# Altium PCB ORCILLOGRAPH.PcbDoc
Units mil, origin at the board's own origin, x right, y up, seen from the top; angles counter-clockwise.
Board outline 1970 x 1574.8 mil, 2 copper layers (Top Layer, Bottom Layer); 55 components, 42 nets, 174 pads, 20 vias.
Unrouted connection lines stored in the file: 1.
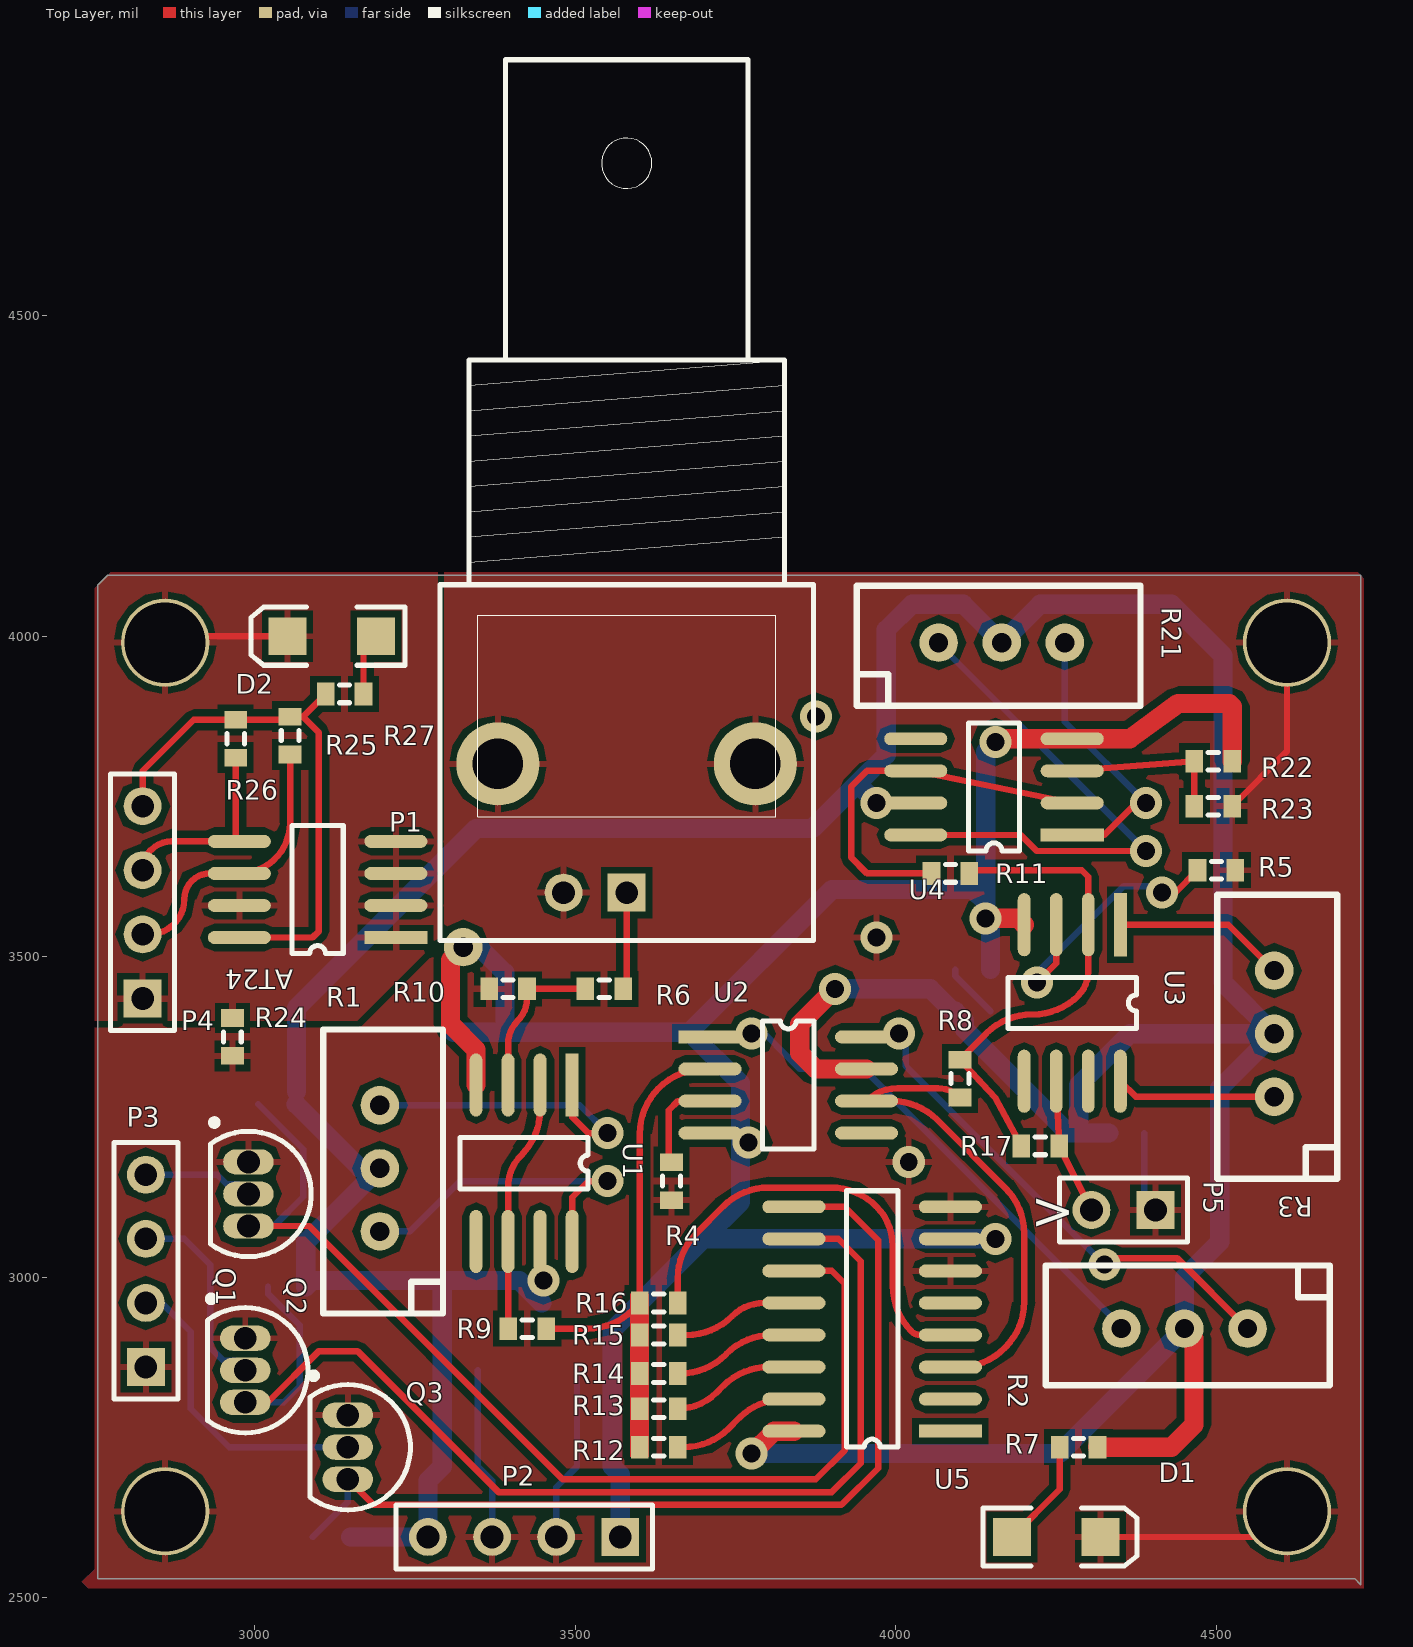
[diagram p0: Top Layer view]
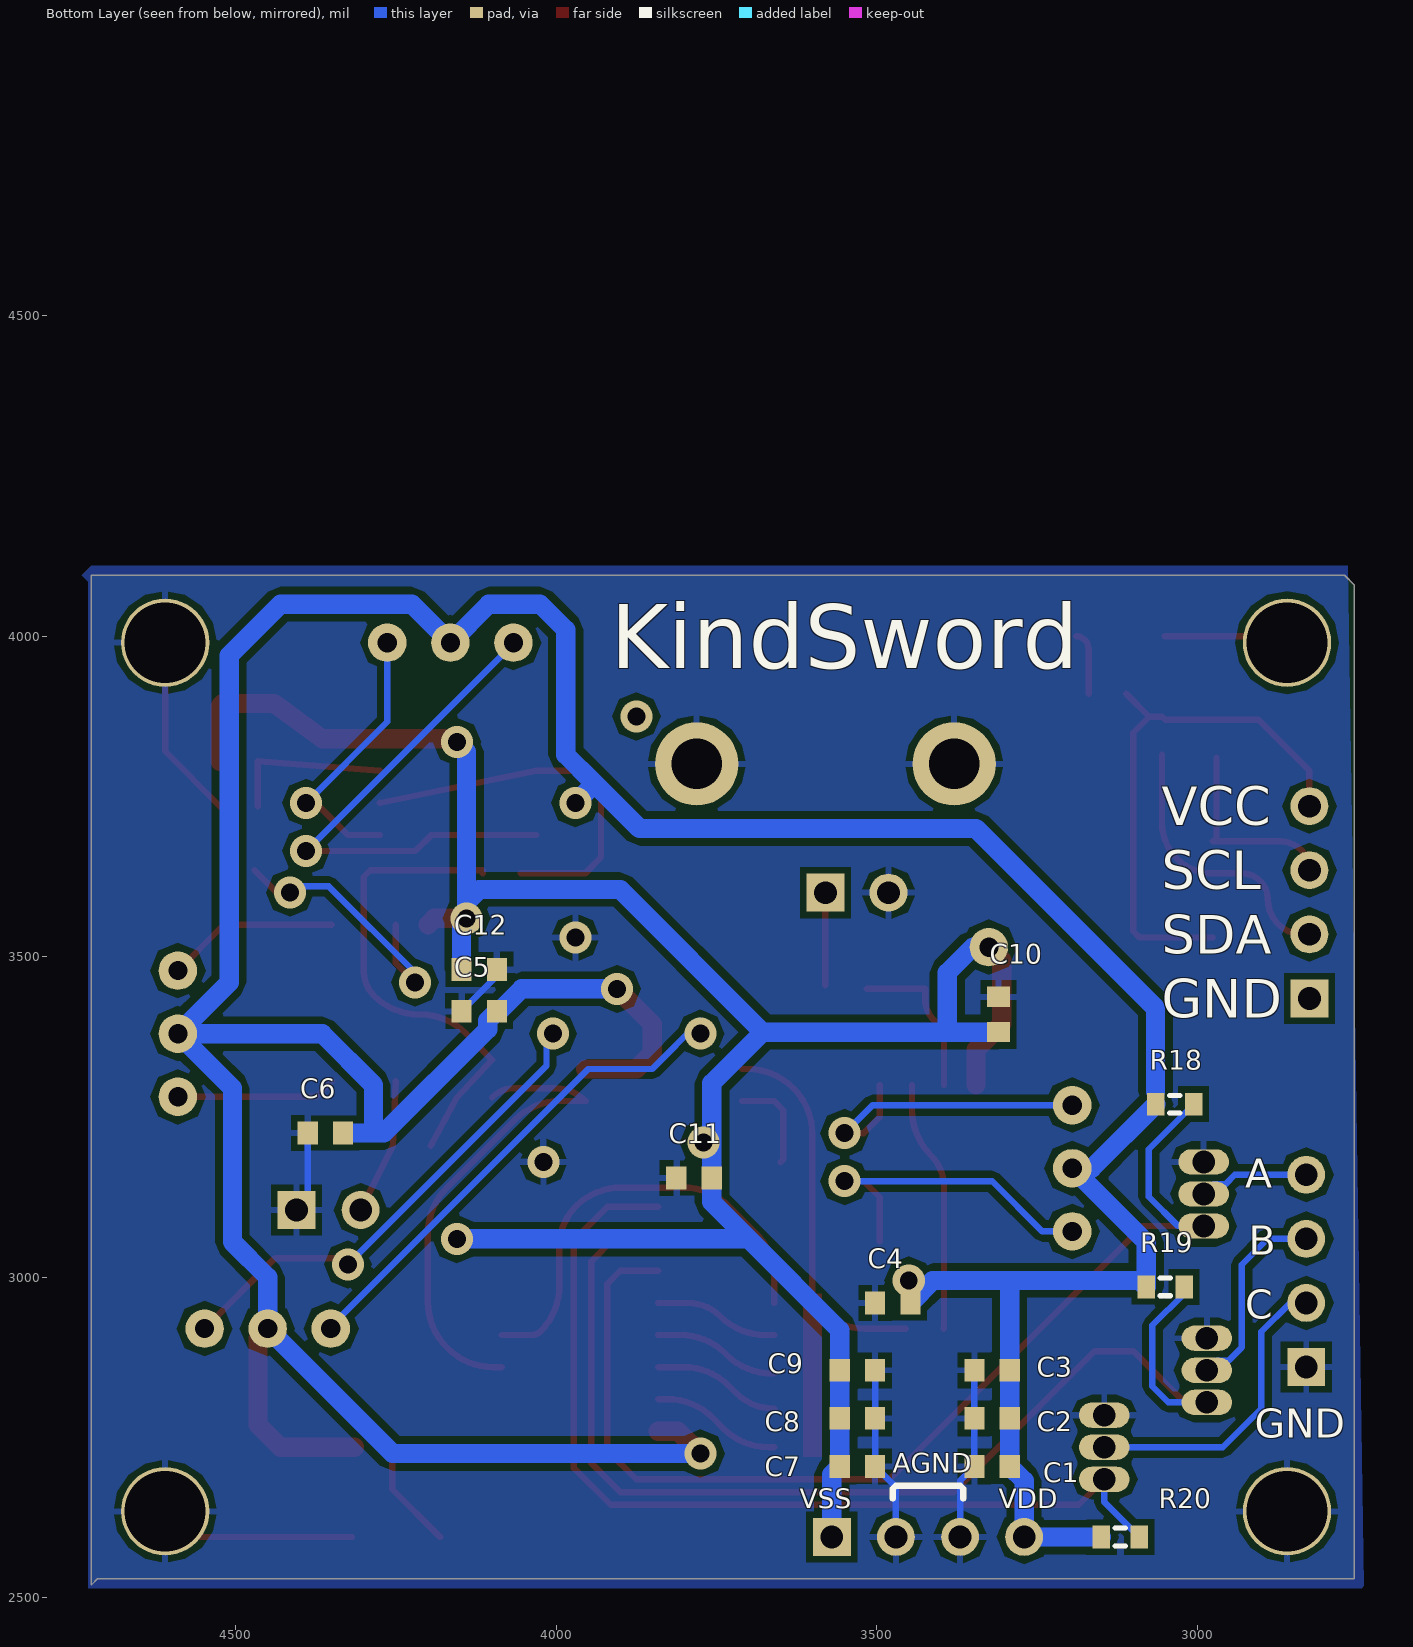
[diagram p1: Bottom Layer view, seen from below]

## Layer stack, top to bottom
Top Layer: signal copper 1.4
Dielectric: dielectric 12.6, FR-4, Dk 4.8
Bottom Layer: signal copper 1.4

## Board outline
2770,4095 2755,4080 2755,2530 4715.2,2530 4725,2520.2 4725,4095

## Design rules (kind name [scope] priority, off if disabled: settings)
Clearance [All] p1: gap=10
PolygonConnect [All] p1: connectstyle=Relief reliefconductorwidth=10 reliefentries=4 polygonreliefangle="90 Angle" airgapwidth=10
RoutingVias [All] p1: holewidth=28 width=50 viastyle="Through Hole" minholewidth=28 minwidth=50 maxholewidth=28 maxwidth=50
SolderMaskExpansion [All] p1: expansion=4
Width Width_VSS [InNet('VSS')] p1: maxlimit=50 minlimit=30 preferedwidth=40
Width Width_VDD [InNet('VDD')] p2: maxlimit=50 minlimit=30 preferedwidth=50
Width Width_ALL [All] p3: maxlimit=10 minlimit=10 preferedwidth=10
28 further rules are at their usual default settings.

## Components (designator, comment, footprint, x,y, rotation, side; value= is the part's Value field where it differs from the comment)
AT24 "AT24C32" AT24 3220,3530 r180 top (schematic designator AT1)
C1 "Cap Semi" 1608[0603] 3320,2705 r180 bottom
C2 "Cap Semi" 1608[0603] 3320,2780 r180 bottom
C3 "Cap Semi" 1608[0603] 3320,2855 r180 bottom
C4 "Cap Semi" 1608[0603] 3475,2960 r180 bottom
C5 "Cap Semi" 1608[0603] 4120,3415 r180 bottom
C6 "Cap Semi" 1608[0603] 4360,3225 r180 bottom
C7 "Cap Semi" 1608[0603] 3530,2705 r180 bottom
C8 "Cap Semi" 1608[0603] 3530,2780 r180 bottom
C9 "Cap Semi" 1608[0603] 3530,2855 r180 bottom
C10 "Cap Semi" 1608[0603] 3310,3410 r90 bottom
C11 "Cap Semi" 1608[0603] 3785,3155 r0 bottom
C12 "Cap Semi" 1608[0603] 4120,3480 r180 bottom
D1 "LED2" 3.2X1.6X1.1 4250,2595 r0 top
D2 "LED2" 3.2X1.6X1.1 3120,4000 r180 top
P1 "BNC" "BNC_RA CON" 3580,3600 r270 top
P2 "Header 4" HDR1X4 3570,2595 r180 top
P3 "Header 4" HDR1X4 2830,2860 r90 top
P4 "Header 4" HDR1X4 2825,3435 r90 top
P5 "Header 2" HDR1X2 4405,3105 r180 top
Q1 "2N3904" TO-92A 2990,3130 r180 top
Q2 "2N3904" TO-92A 2985,2855 r180 top
Q3 "2N3904" TO-92A 3145,2735 r180 top
R1 "可调电阻" 3296可调电阻 3195,3070 r90 top
R2 "可调电阻" 3296可调电阻 4550,2920 r180 top
R3 "可调电阻" 3296可调电阻 4590,3280 r90 top
R4 "Res3" J1-0603 3650,3150 r90 top
R5 "Res3" J1-0603 4500,3635 r180 top
R6 "Res3" J1-0603 3545,3450 r0 top
R7 "Res3" J1-0603 4285,2735 r0 top
R8 "Res3" J1-0603 4100,3310 r270 top
R9 "Res3" J1-0603 3425,2920 r180 top
R10 "Res3" J1-0603 3395,3450 r0 top
R11 "Res3" J1-0603 4085,3630 r180 top
R12 "Res3" J1-0603 3630,2735 r180 top
R13 "Res3" J1-0603 3630,2795 r180 top
R14 "Res3" J1-0603 3630,2850 r180 top
R15 "Res3" J1-0603 3630,2910 r180 top
R16 "Res3" J1-0603 3630,2960 r180 top
R17 "Res3" J1-0603 4225,3205 r180 top
R18 "Res3" J1-0603 3035,3270 r0 bottom
R19 "Res3" J1-0603 3050,2985 r0 bottom
R20 "Res3" J1-0603 3120,2595 r0 bottom
R21 "可调电阻" 3296可调电阻 4065,3990 r0 top
R22 "Res3" J1-0603 4495,3805 r180 top
R23 "Res3" J1-0603 4495,3735 r0 top
R24 "Res3" J1-0603 2965,3375 r270 top
R25 "Res3" J1-0603 3055,3845 r90 top
R26 "Res3" J1-0603 2970,3840 r90 top
R27 "Res3" J1-0603 3140,3910 r180 top
U1 "OP07CD" OP07C 3495,3300 r270 top
U2 "OP07CD" OP07C 3710,3375 r0 top
U3 "OP07CD" OP07C 4350,3550 r270 top
U4 "OP07CD" OP07C 4275,3690 r180 top
U5 "U?" cd4051 4085,2760 r180 top (schematic designator CD1)

## Footprints (in the part's own frame and the unit in brackets; to place one, negate y for a bottom-side part, rotate by r counter-clockwise, add the part's x,y. Pads: shape width x height; smd on the part's side, far side on the other; paste and mask are expansions set on the pad)
3.2X1.6X1.1 [mm] "SMT LED; 2 Flat Leads"
  rect 1.5x1.5 smd: 1(-1.75,0) 2(1.75,0)
  silkscreen extent -2.9,-1.15 3.2,1.15
1608[0603] [mm] "Chip Capacitor, Body 1.6x0.8mm, IPC High Density"
  rect 0.8x0.9 smd: 1(-0.7,0) 2(0.7,0)
  body extent -0.87,-0.48 0.87,0.48, height 1.3
3296可调电阻 [mil]
  round 60 hole 30: 0(1.57,0) 1(100,0) 2(198.43,0)
  silkscreen extent -126,-98 317,89
AT24 [mm]
  rect 2.5x0.51 smd: 1(0,0)
  oval 2.5x0.51 smd: 2(0,-1.27) 3(0,-2.54) 4(0,-3.81) 5(6.2,-3.81) 6(6.2,-2.54) 7(6.2,-1.27) 8(6.2,0)
  silkscreen extent 2.08,-4.44 4.12,0.64
"BNC_RA CON" [mm] "Connector; BNC Elbow"
  rect 1.5x1.5 hole 0.9: 1(0,0)
  round 3.3 hole 2: 2(-5.1,5.1) 2(-5.1,-5.1)
  round 1.5 hole 0.9: 2(0,-2.5)
  silkscreen extent -33,-7.4 1.9,7.4
cd4051 [mm]
  rect 2.5x0.51 smd: 1(0,0)
  oval 2.5x0.51 smd: 2(0,-1.27) 3(0,-2.54) 4(0,-3.81) 5(0,-5.08) 6(0,-6.35) 7(0,-7.62) 8(0,-8.89) 9(6.2,-8.89) 10(6.2,-7.62) 11(6.2,-6.35) 12(6.2,-5.08) 13(6.2,-3.81) 14(6.2,-2.54) 15(6.2,-1.27) 16(6.2,0)
  silkscreen extent 2.08,-9.53 4.12,0.64
HDR1X2 [mm] "Connector; Header; 2 Position"
  rect 1.5x1.5 hole 0.9: 1(0,0)
  round 1.5 hole 0.9: 2(2.54,0)
  silkscreen extent -1.27,-1.27 3.81,1.27
HDR1X4 [mm] "Connector; Header; 4 Position"
  rect 1.5x1.5 hole 0.9: 1(0,0)
  round 1.5 hole 0.9: 2(2.54,0) 3(5.08,0) 4(7.62,0)
  silkscreen extent -1.27,-1.27 8.89,1.27
J1-0603 [mm] "Chip Resistor, Body 1.6x0.8mm, IPC High Density"
  rect 0.7x0.9 smd: 1(-0.75,0) 2(0.75,0)
  silkscreen extent -0.2,-0.35 0.2,0.35, body extent -0.85,-0.48 0.85,0.48, height 0.9
OP07C [mm]
  rect 2.5x0.51 smd: 1(0,0)
  oval 2.5x0.51 smd: 2(0,-1.27) 3(0,-2.54) 4(0,-3.81) 5(6.2,-3.81) 6(6.2,-2.54) 7(6.2,-1.27) 8(6.2,0)
  silkscreen extent 2.08,-4.44 4.12,0.64
TO-92A [mm] "TO, Flat Index; 3 In-Line, Axial Leads; Body Dia. 4.5mm; Leads 0.51 x 0.48 mm (max)"
  oval 2x1 hole 0.9: 1(0,-1.27) 2(0,0) 3(0,1.27)
  silkscreen extent -2.48,-2.95 1.5,2.48, body extent -2.5,-2.5 1.5,2.5, height 6.86

## Part data
C1 C2 C3 C4 C5 C6 C7 C8 C9 C10 C11 C12: "Capacitor (Semiconductor SIM Model)"
D1 D2: "Typical RED, GREEN, YELLOW, AMBER GaAs LED"
P1: "BNC Elbow Connector"
P2 P3 P4: "Header, 4-Pin"
P5: "Header, 2-Pin"
Q1 Q2 Q3: "NPN General Purpose Amplifier"
R1 R2 R3 R21: library part 3296可调电阻, "R?"
R4 R5 R6 R7 R8 R9 R10 R11 R12 R13 R14 R15 R16 R17 R18 R19 R20 R22 R23 R24 R25 R26 R27: "Resistor"
U5: library part CD4051B, "CD4051"

## Free pads (board coordinates)
  round 137.8 hole 125.98: 0(2860,2635) 0(2860,3990) 0(4610,2635) 0(4610,3990)
  round 60 hole 30: 4(3325,3515)

## Via types
v1: diameter 50, hole 28, Top Layer to Bottom Layer, 20 vias

## Nets (pads, with @x,y where several pads share a name; then routed paths per layer and width w, separated by ;. In a path a pad name is that pad's centre, name@x,y a point inside that pad or via, vN(x,y) a via of type N, cw(c..) or ccw(c..) an arc to the next point about the centre after c; other vN are vias at no path point)
AGND: C1.1 C2.1 C3.1 C4.1 C5.1 C6.1 C7.2 C8.2 C9.2 C10.2 C11.2 C12.2 D1.2 P1.2 P2.2 P2.3 P3.1 P5.1 pad.0@2860,2635 pad.0@4610,2635 pad.0@4610,3990 Q1.1 Q2.1 Q3.1 R4.1 R5.1 R10.1 R23.2 R24.2 U5.6 U5.8 | length 1285.9
  Top Layer w10: D1.2 4570,2595 pad.0@4610,2635 ; R23.2 4610,3820.47 4610,3920
  Bottom Layer w10: C3.1 C2.1 C1.1 3370,2682.56 P2.3 ; P2.2 3470,2672.56 C7.2 C8.2 C9.2 ; C12.2 4092.44,3470.12 C5.1 ; C6.1 4387.56,3122.44 P5.1
  other v1: 4020,3180 3970,3530
CD_A: P3.4 Q1.2 | length 172.4
  Bottom Layer w10: P3.4 2941.26,3160 2955.95,3145.31 2974.69,3145.31 Q1.2
CD_B: P3.3 Q2.2 | length 315.3
  Bottom Layer w10: P3.3 2890,3060 2930.63,3019.37 2930.63,2890.63 2950.95,2870.31 2969.69,2870.31 Q2.2
CD_C: P3.2 Q3.2 | length 478.5
  Bottom Layer w10: P3.2 2855,2960 2900,2915 2900,2795 2960,2735 Q3.2
GND: AT24.1 AT24.2 AT24.3 AT24.4 AT24.7 D2.2 P4.1 pad.0@2860,3990 R24.1 | length 196.8
  Top Layer w10: pad.0@2860,3990 cw(c2870,3990) 2870,4000 D2.2
NetCD1_3: R8.2 U2.6 U5.3 | length 782
  Top Layer w10: U5.3 4098.58,2860 ccw(c4098.58,2960) 4169.29,2889.29 4170.71,2890.71 ccw(c4100,2961.42) 4200,2961.42 4200,3068.58 ccw(c4100,3068.58) 4170.71,3139.29 4064.29,3245.71 ccw(c3993.58,3175) 3993.58,3275 U2.6 cw(c4002.38,3226.72) 4002.38,3295 4064.93,3295 cw(c4064.93,3245.4) R8.2
NetD1_1: D1.1 R7.1 | length 170.8
  Top Layer w10: D1.1 4255.47,2669.37 R7.1
NetD2_1: D2.1 R27.1 | length 101.1
  Top Layer w10: R27.1 3169.53,3980.63 cw(c3188.9,3980.63) D2.1
NetP1_1: P1.1 R6.2 | length 144.5
  Top Layer w10: R6.2@3580,3455.47 P1.1
NetR1_0: R1.0 U1.8 | length 521.9
  Top Layer w10: U1.8 3495,3125 3520,3150 v1(3550,3150)
  Bottom Layer w10: R1.0 3241.57,3071.57 3320,3150 v1(3550,3150)
NetR1_2: R1.2 U1.1 | length 488.3
  Top Layer w10: U1.1 3495,3250 3520,3225 v1(3550,3225)
  Bottom Layer w10: R1.2 3506.57,3268.43 v1(3550,3225)
NetR2_0: R2.0 U2.8 | length 742.4
  Top Layer w10: v1@4325,3030 4438.43,3030 R2.0
  Bottom Layer w10: v1@4015,3365 4015,3330 v1(4325,3020)
  other v1: 4005,3380
NetR2_2: R2.2 U2.1 | length 777.4
  Bottom Layer w10: v1@3775,3400 3850,3325 3950,3325 4351.57,2923.43 R2.2
  other v1: 3775,3380
NetR3_0: R3.0 U3.8 | length 250.1
  Top Layer w10: U3.8 4374.33,3281.57 R3.0
NetR3_2: R3.2 U3.1 | length 269.6
  Top Layer w10: U3.1 4518.43,3550 R3.2
NetR4_2: R4.2 U2.3 | length 153.1
  Top Layer w10: R4.2 3645.79,3183.74 3645.79,3260.79 3660,3275 U2.3
NetR5_2: R5.2 U3.3 | length 453.3
  Top Layer w10: v1(4220,3460) 4250,3490 U3.3 ; v1(4415,3600) 4435.47,3600 R5.2
  Bottom Layer w10: v1(4220,3460) 4220,3475 4355,3610 v1@4415,3610 ; v1(4415,3600) v1@4430,3600
NetR6_1: R6.1 R10.2 U1.3 | length 248.8
  Top Layer w10: U1.3 3395,3363.79 cw(c3446.21,3363.79) 3410,3400 ccw(c3374.93,3435.07) 3424.53,3435.07 R10.2 R6.1
NetR8_1: R8.1 R11.1 R17.2 U3.2 | length 767.8
  Top Layer w10: R11.1 4114.53,3635 4290,3635 4300,3625 U3.2 4300,3477.22 cw(c4246.36,3477.22) 4284.29,3439.29 cw(c4213.58,3510) 4213.58,3410 4211.89,3410 ccw(c4211.89,3310) 4141.18,3380.71 R8.1 4155,3280 R17.2
NetR9_1: R9.1 R12.2 R13.2 R14.2 R15.2 R16.2 U2.2 | length 574.1
  Top Layer w10: R9.1 3519.05,2920 ccw(c3519.05,3020) R16.2@3589.76,2949.29 ; R16.2 3600.47,3224.05 cw(c3700.47,3224.05) 3629.76,3294.76 3630.71,3295.71 cw(c3701.42,3225) 3701.42,3325 U2.2
NetR9_2: R9.2 U1.2 U1.6 | length 393.5
  Top Layer w10: R9.2 cw(c3396.61,2921.14) 3395,2921.14 U1.6 3395,3140.71 cw(c3465.71,3140.71) 3415.71,3190.71 ccw(c3345,3261.42) 3445,3261.42 U1.2
NetR11_2: R11.2 U4.2 U4.6 | length 606.3
  Top Layer w10: R11.2 3955,3630 3930,3655 3930,3765 3955,3790 U4.6 U4.2
NetR21_0: R21.0 U4.8 | length 828.4
  Top Layer w10: U4.8 4194.53,3690 4219.57,3664.96 v1(4390,3665) v1(4390,3665)
  Bottom Layer w10: R21.0 4066.57,3988.43 v1(4390,3665)
NetR21_2: R21.2 U4.1 | length 438.1
  Top Layer w10: U4.1 4325,3690 4375,3740 v1(4390,3740)
  Bottom Layer w10: R21.2 4263.43,3866.57 v1(4390,3740)
NetR22_2: R22.2 R23.1 U4.3 | length 261.1
  Top Layer w10: U4.3 R22.2 R23.1
OUTPUT: P5.2 R17.1 U3.6 | length 213
  Top Layer w10: U3.6 R17.1 P5.2
SCL: AT24.6 P4.2 R25.1 | length 435.8
  Top Layer w10: P4.2 2835,3535 ccw(c2835,3590) 2890,3590 cw(c2930,3590) 2930,3630 AT24.6 ccw(c2975.91,3709.09) 3055,3709.09 R25.1
SDA: AT24.5 P4.3 R26.1 | length 310.4
  Top Layer w10: P4.3 cw(c2870,3635) 2870,3680 AT24.5 cw(c2975.91,3685.91) 2970,3685.91 R26.1
SW_A: Q1.3 R18.1 U5.11 | length 1737.5
  Top Layer w10: Q1.3 3085,3080 3480,2685 3875,2685 3920,2730 3920,2990 3900,3010 U5.11
  Bottom Layer w10: Q1.3 3030,3080 3075.47,3125.47 3075.47,3200 R18.1
SW_B: Q2.3 R19.1 U5.10 | length 1807.4
  Top Layer w10: Q2.3 3020,2805 3100,2885 3160,2885 3380,2665 3900,2665 3945,2710 3945,3025 3910,3060 U5.10
  Bottom Layer w10: Q2.3 3045,2805 3070,2830 3070,2925 3020.47,2974.53 R19.1
SW_C: Q3.3 R20.1 U5.9 | length 1488.6
  Top Layer w10: Q3.3 3185,2645 3915,2645 3972.28,2702.28 3972.28,3057.72 3920,3110 U5.9
  Bottom Layer w10: R20.1 3145,2649.53 Q3.3
T0: R14.1 U5.13 | length 197.6
  Top Layer w10: R14.1 3663.58,2850 ccw(c3663.58,2950) 3734.29,2879.29 3735.71,2880.71 cw(c3806.42,2810) 3806.42,2910 U5.13
T1: R13.1 U5.14 | length 200.3
  Top Layer w10: R13.1 ccw(c3659.53,2880.64) 3720.08,2820.08 3730.71,2830.71 cw(c3801.42,2760) 3801.42,2860 U5.14
T2: R12.1 U5.15 | length 203.8
  Top Layer w10: R12.1 3668.58,2735 ccw(c3668.58,2835) 3739.29,2764.29 3755.71,2780.71 cw(c3826.42,2710) 3826.42,2810 U5.15
T3: R15.1 U5.12 | length 194.7
  Top Layer w10: R15.1 3673.58,2910 ccw(c3673.58,3010) 3744.29,2939.29 cw(c3794.29,2889.29) 3794.29,2960 U5.12
T4: U5.1
T5: U5.5
T6: U5.2
T7: R16.1 U5.4 | length 702.1
  Top Layer w10: R16.1 3659.53,2998.11 cw(c3759.53,2998.11) 3688.82,3068.82 3730.71,3110.71 cw(c3801.42,3040) 3801.42,3140 3898.58,3140 cw(c3898.58,3040) 3969.29,3110.71 cw(c3907.22,3048.64) 3995,3048.64 3995,2986.42 ccw(c4095,2986.42) 4024.29,2915.71 ccw(c4038.08,2929.5) 4038.08,2910 U5.4
VCC: AT24.8 P4.4 R25.2 R26.2 R27.2 | length 863.3
  Top Layer w10: P4.4 2825,3790 2904.53,3869.53 R26.2 3050,3869.53 R25.2 3075,3874.53 ; AT24.8 3090,3530 3100,3540 3100,3849.53 3075,3874.53 ; R27.2 3075,3874.53
VDD: C1.2 C2.2 C3.2 C4.2 C5.2 C6.2 P2.4 R1.1 R2.1 R3.1 R7.2 R18.2 R19.2 R20.2 R21.1 U1.7 U2.7 U3.7 U4.7 U5.16 | length 6875.5
  Top Layer w30: v1(3775,2725) 3810,2760 U5.16 ; v1(3905,3450) 3850,3395 3850,3350 3875,3325 U2.7 ; R7.2 4430,2735 4465,2770 4465,2905 R2.1
  Bottom Layer w30: R18.2 3164.53,3170 R1.1 3079.53,3054.53 R19.2 3089.53,2995 3292.44,2995 ; 3065,3290 3065,3420 3345,3700 3870,3700 3942.5,3772.5 ; R20.2 P2.4 3270,2682.56 C1.2 C2.2 C3.2 3292.44,2995 ; C4.2 3412.44,2995 3292.44,2995 ; v1(3775,2725) 4255,2725 R2.1 4450,3000 4505,3055 4505,3295 R3.1 ; v1(3905,3450) 4053.62,3450 4088.62,3415 C5.2 4106.81,3400.63 4106.81,3386.93 4268.74,3225 4285,3225 ; v1(3970,3740) 3942.5,3767.5 3942.5,3772.5 ; C6.2 4285,3225 ; 3942.5,3772.5 3985,3815 3985,4010 4025,4050 4105,4050 R21.1 4225,4050 4430,4050 4510,3970 4510,3460 R3.1 ; 4285,3225 4285,3300 4365,3380 R3.1
  other v1: 3450,2995
VSS: C7.1 C8.1 C9.1 C10.1 C11.1 C12.1 P2.1 pad.4 R22.1 U1.4 U2.4 U3.4 U4.4 U5.7 | length 3613.4
  Top Layer w30: pad.4 3305,3495 3305,3395 3345,3355 U1.4 ; v1(4140,3560) 4190,3560 U3.4 ; v1(4155,3835) 4160,3840 U4.4 4365,3840 4440,3895 4520,3895 4524.53,3890.47 R22.1
  Bottom Layer w30: C10.1 3390,3382.44 ; pad.4 3350,3515 3390,3475 3390,3382.44 ; P2.1 3570,2692.56 C7.1 C8.1 C9.1 3557.56,2917.56 3700,3060 ; C12.1 4147.56,3552.44 v1(4140,3560) 4140,3585 ; v1(4155,3060) 3700,3060 ; v1(4155,3835) 4140,3820 4140,3585 ; 3390,3382.44 3677.56,3382.44 ; 3677.56,3382.44 3900.12,3605 4120,3605 4140,3585 ; 3677.56,3382.44 3757.44,3302.56 C11.1 3757.44,3117.44 3700,3060
  other v1: 3770,3210
pads on no net: U1.5 U2.5 U3.5 U4.5
copper on no net:
  other v1: 3875,3875

## Polygon pours and split planes (outlines as drawn)
AGND on Top Layer "Bottom Layer-No Net" (solid, remove dead copper, pour order 12): 3285,4100 4720,4100 4725,4095 4730,4090 4730,2515 2740,2515 2730,2525 2750,2545 2750,4110
GND on Top Layer "Bottom Layer-No Net" (solid, remove dead copper, pour order 2): 2775,4100 3285,4100 3285,3525 3245,3485 3160,3400 2750,3400 2750,4075
AGND on Bottom Layer "Bottom Layer-No Net" (solid, remove dead copper, pour order 14): 2765,4110 4725,4110 4740,4095 4730,4085 4730,2515 2740,2515

## Other copper
Top Layer:
  rectangle net NetR9_1: 3585,2720 3615,2975

## Silkscreen, mask and mechanical layers (free items; w line width, h text height)
Top Overlay:
  text ">" at 4210,3075 h60
Bottom Overlay:
  lines w10: 3365,2655 3365,2670 3370,2675 3470,2675 3475,2670 3475,2655
  text "KindSword" at 3915,3950 h100
  text "VCC" at 3055,3705 h60
  text "SCL" at 3055,3605 h60
  text "SDA" at 3055,3505 h60
  text "GND" at 3055,3405 h60
  text "A" at 2925,3140 h45
  text "B" at 2920,3035 h45
  text "C" at 2925,2935 h45
  text "GND" at 2910,2750 h45
  text "AGND" at 3475,2695 h30
  text "VDD" at 3310,2640 h30
  text "VSS" at 3620,2640 h30